# Altium PCB drawingBoard.PcbDoc
Units mm, origin at the board's own origin, x right, y up, seen from the top; angles counter-clockwise.
Board outline 90.17 x 76.83 mm, 2 copper layers (Top Layer, Bottom Layer); 36 components, 54 nets, 226 pads, 16 vias.
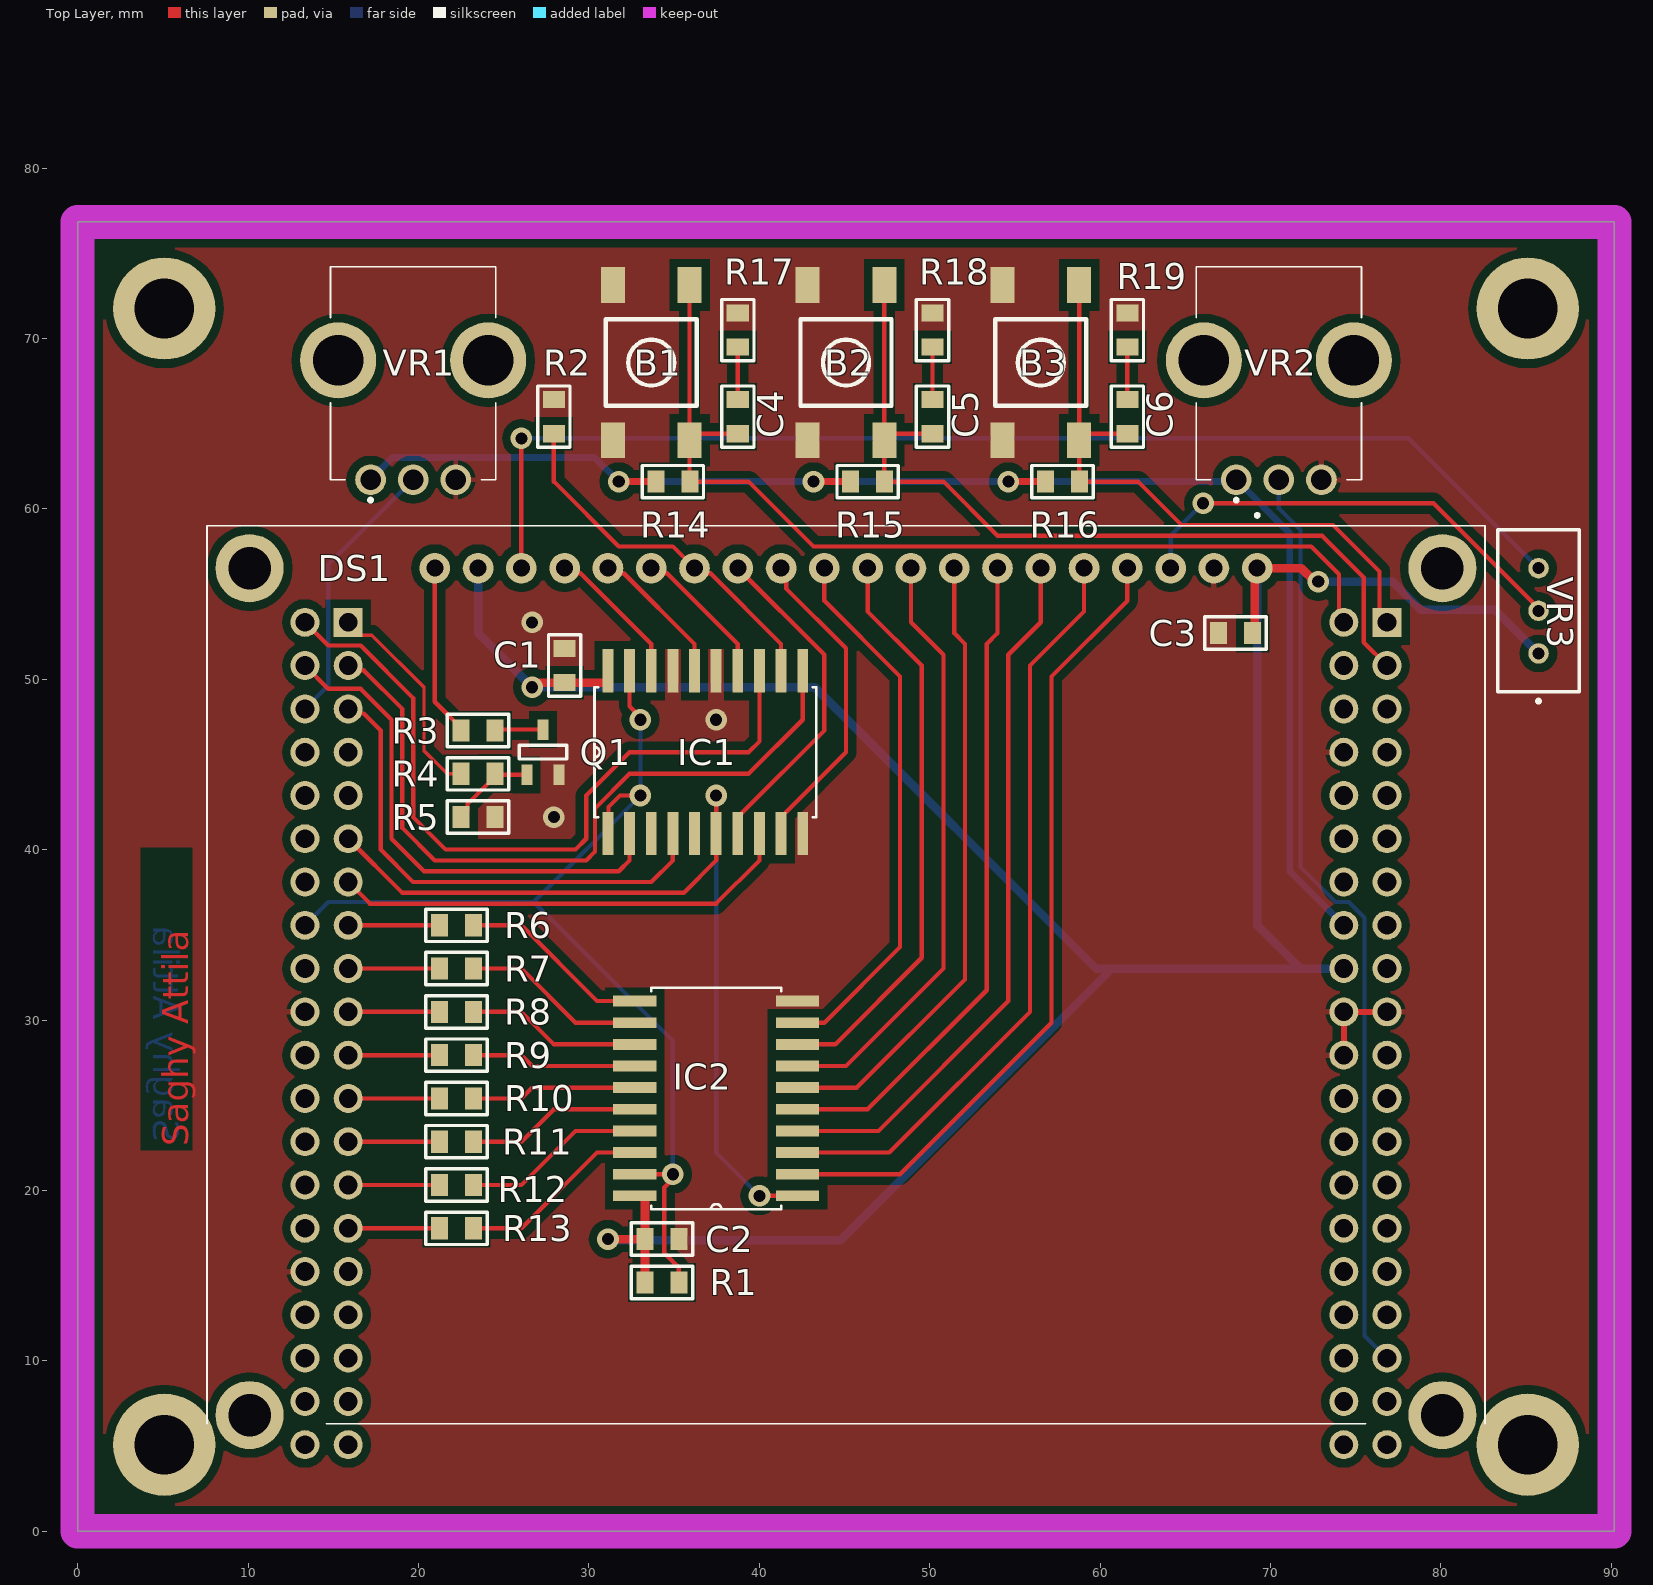
[diagram p0: Top Layer view]
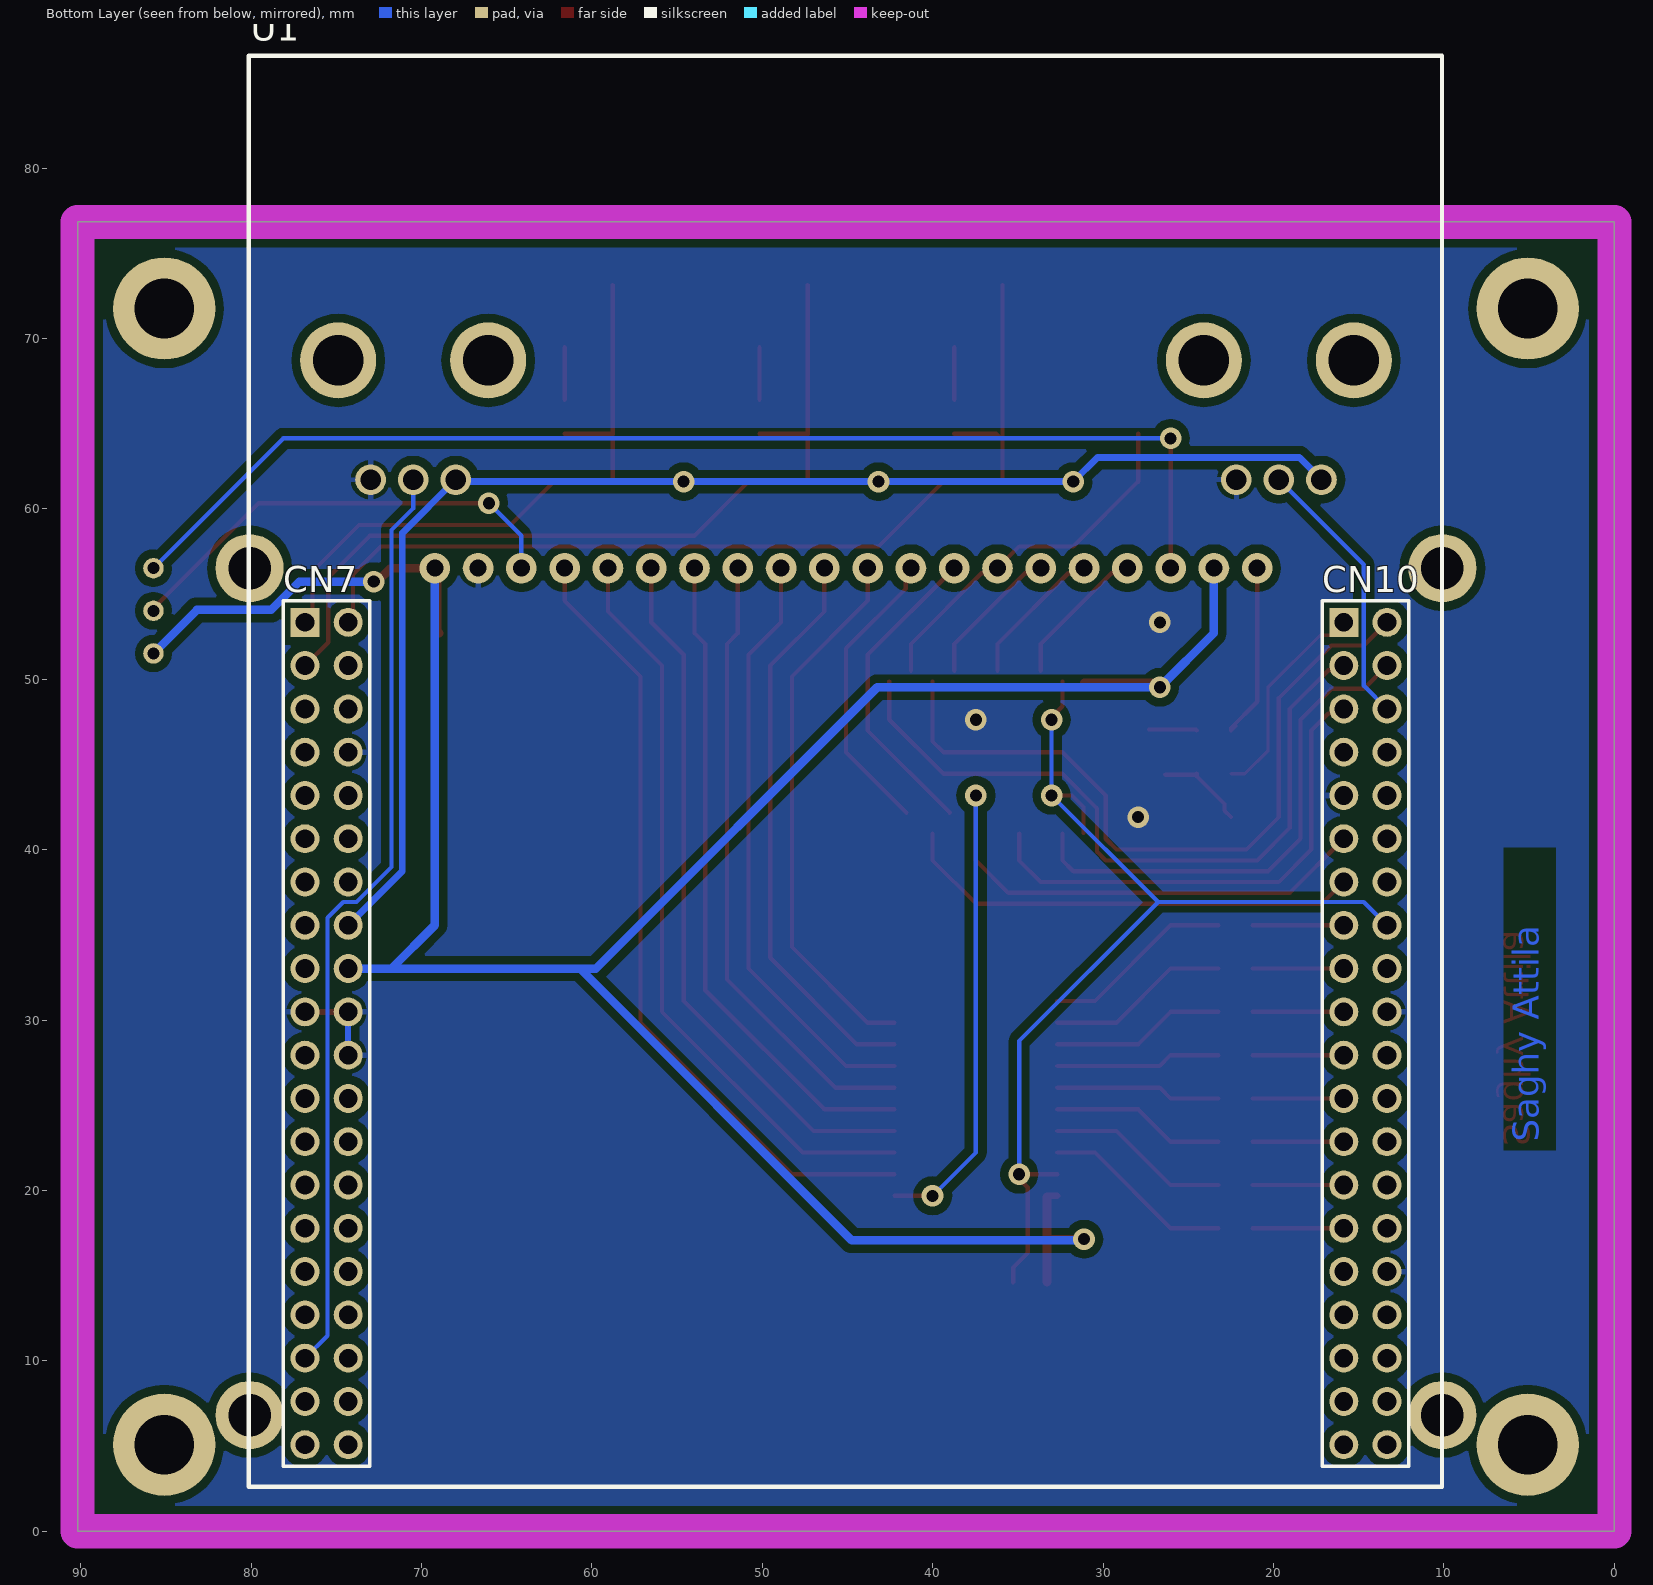
[diagram p1: Bottom Layer view, seen from below]
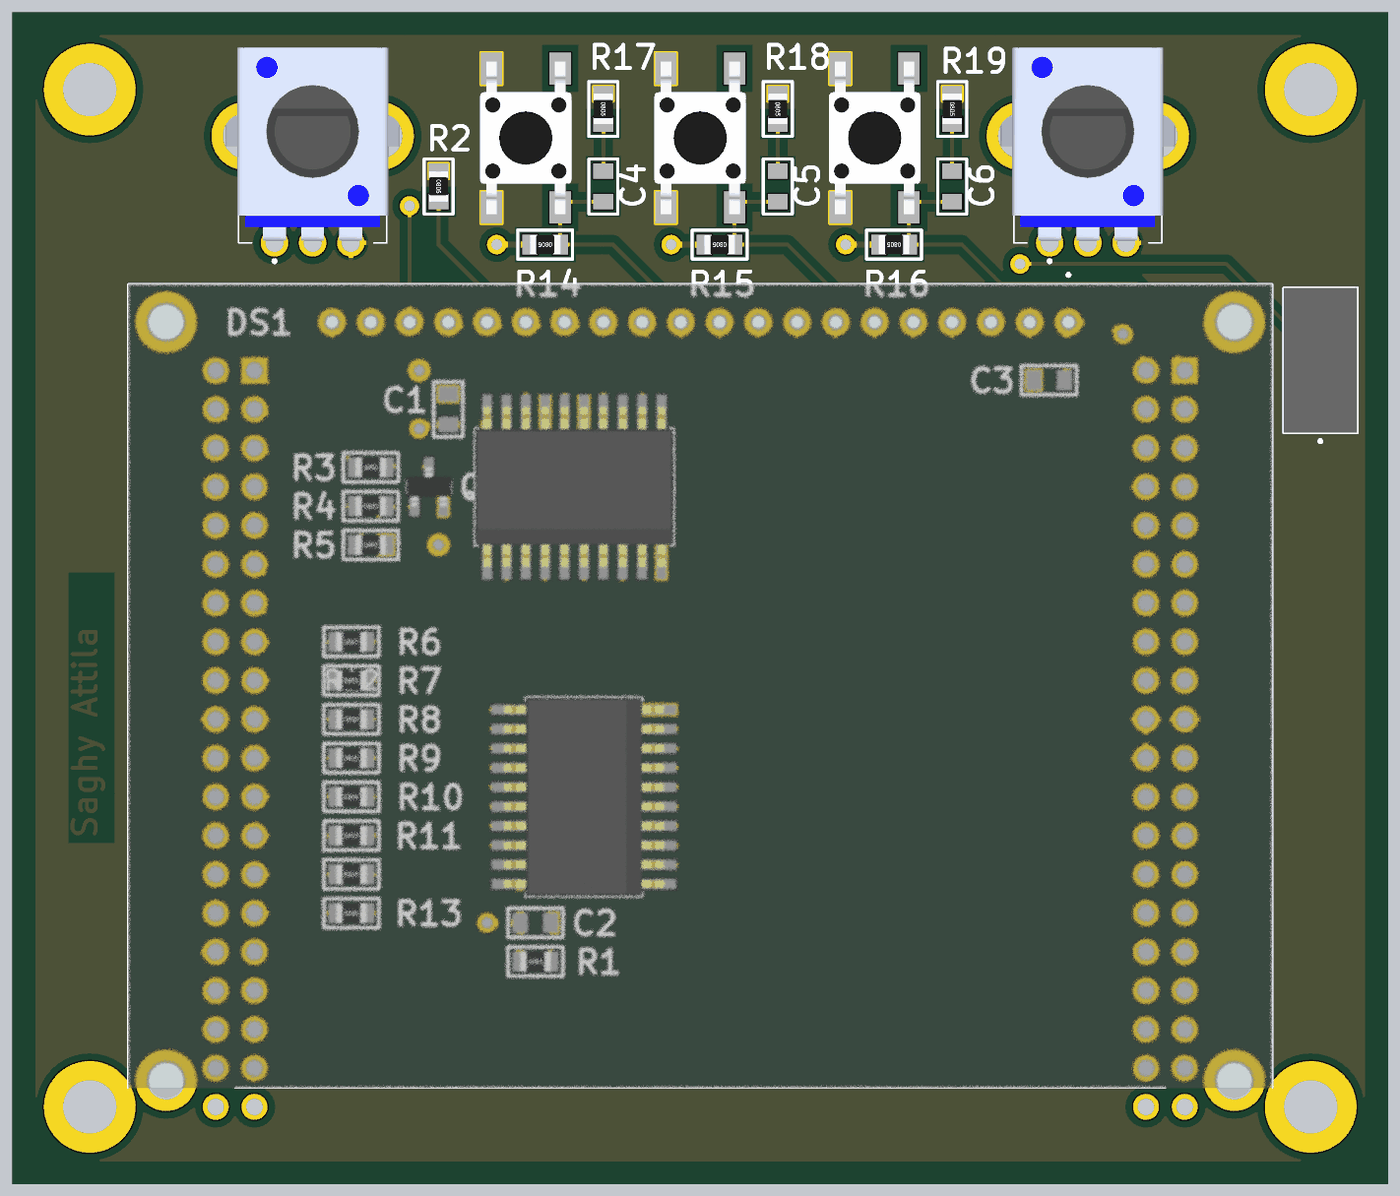
[diagram p2: 3D render of the assembled board from above, using the file's embedded part models]

## Layer stack, top to bottom
Top Solder: solder mask 0.0102, Solder Resist, Dk 3.5
Top Layer: signal copper 0.0356
Dielectric 1: dielectric 0.32, FR-4, Dk 4.8
Bottom Layer: signal copper 0.0356
Bottom Solder: solder mask 0.0102, Solder Resist, Dk 3.5

## Board outline
90.17,76.835 0,76.835 0,0 90.17,0

## Design rules (kind name [scope] priority, off if disabled: settings)
BoardOutlineClearance [All] p1: gap=0.5 ignorepadtopadclearanceinfootprint=FALSE
Clearance [All] p1: gap=0.25 ignorepadtopadclearanceinfootprint=FALSE except(0: Arc-Hole Track-Hole SMDPad-Hole THPad-Hole Via-Hole Fill-Hole Poly-Hole Region-Hole Text-Hole; 0.2: Track-THPad Track-Via THPad-THPad THPad-Via Via-Via; 0.5: Arc-Poly Track-Poly SMDPad-Poly THPad-Poly Via-Poly Fill-Poly Poly-Poly)
ComponentClearance [All] p1: gap=0.254 collisioncheckmode=3 verticalgap=0.2 showdistances=FALSE donotcheckwithout3dbody=TRUE
DiffPairsRouting [All] p1: maxlimit=0.25 minlimit=0.25 mostfreqgap=0.25 toplayer_minwidth=0.3 toplayer_maxwidth=0.38 toplayer_prefwidth=0.38 bottomlayer_minwidth=0.3 bottomlayer_maxwidth=0.38 bottomlayer_prefwidth=0.38 maxuncoupledlength=12.7
HoleSize [All] p1: absolutevalues=TRUE maxlimit=5 minlimit=0.4 maxpercent=80.000 minpercent=20.000
HoleToHoleClearance [All] p1: gap=0.25 allowstackedmicrovias=TRUE
MinimumAnnularRing [All] p1: minimumring=0.2
MinimumSolderMaskSliver [All] p1: minsoldermaskwidth=0.05
PlaneClearance [All] p1: clearance=0.5
PlaneConnect [All] p1: pad.planeconnectstyle=Relief pad.reliefexpansion=0.5 pad.reliefentries=4 pad.reliefconductorwidth=0.3 pad.reliefairgap=0.25 via.planeconnectstyle=Direct via.reliefexpansion=0.508 via.reliefentries=4 via.reliefconductorwidth=0.254 via.reliefairgap=0.254
PolygonConnect [All] p1: thpad.connectstyle=Relief thpad.reliefconductorwidth=0.3 thpad.reliefentries=4 thpad.polygonreliefangle="90 Angle" thpad.airgapwidth=0.25 smdpad.connectstyle=Direct smdpad.reliefconductorwidth=0.3 smdpad.reliefentries=4 smdpad.polygonreliefangle="90 Angle" smdpad.airgapwidth=0.25 via.connectstyle=Direct via.reliefconductorwidth=0.3 via.reliefentries=4 via.polygonreliefangle="90 Angle" via.airgapwidth=0.25
RoutingVias [All] p1: holewidth=0.4 width=0.8 viastyle="Through Hole" minholewidth=0.3 minwidth=0.7 maxholewidth=0.7 maxwidth=1.2
SilkToSilkClearance [All] p1: silktosilkclearance=0.1
SilkToSolderMaskClearance [IsPad] p1: minsilkscreentomaskgap=0.1 clearancetoexposedcopper=TRUE
SolderMaskExpansion [All] p1: expansion=0.1 istentingtop=FALSE
Width [All] p1: maxlimit=2.5 minlimit=0.2 preferedwidth=0.25
21 further rules are at their usual default settings.

## Classes and differential pairs
component class LCD: C1 C2 C3 DS1 IC1 IC2 Q1 R1 R2 R3 R4 R5 R6 R7 R8 R9 R10 R11 R12 R13 VR3
component class Inputs: B1 B2 B3 C4 C5 C6 R14 R15 R16 R17 R18 R19 VR1 VR2
component class Nucleo: U1

## Components (designator, comment, footprint, x,y, rotation, side; value= is the part's Value field where it differs from the comment)
B1 "Button" FP_BTN_SMD 33.655,68.58 r180 top
B2 "Button" FP_BTN_SMD 45.085,68.58 r180 top
B3 "Button" FP_BTN_SMD 56.515,68.58 r180 top
C1 "100n" FP_0805_CAP_085 28.575,50.8 r270 top
C2 "100n" FP_0805_CAP_085 34.29,17.145 r0 top
C3 "100n" FP_0805_CAP_085 67.945,52.705 r0 top
C4 "100n" FP_0805_CAP_085 38.735,65.405 r90 top
C5 "100n" FP_0805_CAP_085 50.165,65.405 r90 top
C6 "100n" FP_0805_CAP_085 61.595,65.405 r90 top
DS1 "RG12864B-BIW-V" RG12864BBIWV 69.215,56.515 r180 top locked
IC1 "74HCT244D" SOIC127P1032X265-20N 36.83,45.72 r90 top locked
IC2 "74HCT245D" SOIC127P1032X265-20N 37.465,25.4 r180 top locked
Q1 "2N7002" FP_SOT23-3 27.305,45.72 r270 top
R1 "10k" FP_0805_RES 34.29,14.605 r180 top
R2 "10k" FP_0805_RES 27.94,65.405 r270 top
R3 "100" FP_0805_RES 23.495,46.99 r180 top
R4 "1k" FP_0805_RES 23.495,44.45 r0 top
R5 "10k" FP_0805_RES 23.495,41.91 r180 top
R6 "1k" FP_0805_RES 22.225,17.78 r0 top
R7 "1k" FP_0805_RES 22.225,20.32 r0 top
R8 "1k" FP_0805_RES 22.225,22.86 r0 top
R9 "1k" FP_0805_RES 22.225,25.4 r0 top
R10 "1k" FP_0805_RES 22.225,27.94 r0 top
R11 "1k" FP_0805_RES 22.225,30.48 r0 top
R12 "1k" FP_0805_RES 22.225,33.02 r0 top
R13 "1k" FP_0805_RES 22.225,35.56 r0 top
R14 "10k" FP_0805_RES 34.925,61.595 r180 top
R15 "10k" FP_0805_RES 46.355,61.595 r180 top
R16 "10k" FP_0805_RES 57.785,61.595 r180 top
R17 "100" FP_0805_RES 38.735,70.485 r270 top
R18 "100" FP_0805_RES 50.165,70.485 r270 top
R19 "100" FP_0805_RES 61.595,70.485 r270 top
U1 "NUCLEO-F446RE" FP_NUCLEO-64_2x20 76.835,53.34 r180 bottom locked
VR1 "PTV09A-4020F-B104" PTV09A4020FB103 19.685,67.31 r0 top
VR2 "PTV09A-4020F-B104" PTV09A4020FB103 70.485,67.31 r0 top
VR3 "RKT3296-103-W" RKT3296103W 85.725,51.515 r90 top

## Footprints (in the part's own frame and the unit in brackets; to place one, negate y for a bottom-side part, rotate by r counter-clockwise, add the part's x,y. Pads: shape width x height; smd on the part's side, far side on the other; paste and mask are expansions set on the pad)
FP_0805_CAP_085 [mm] "0805 kapacitás YAGEO 0.85mm magas"
  rect 1x1.3 smd: 1(-1,0) 2(1,0)
  silkscreen extent -1.8,-0.95 1.8,0.95, body extent -1,-0.64 1.03,0.64, height 0.85
FP_0805_RES [mm] "0805 ellenállás"
  rect 1x1.3 smd: 1(-1,0) 2(1,0)
  silkscreen extent -1.8,-0.95 1.8,0.95, body extent -1,-0.62 1,0.63, height 0.62
FP_BTN_SMD [mm] "SMD Push Button 6x6mm"
  rect 1.4x2.1 smd: 1(2.25,4.55) 2(2.25,-4.55) 3(-2.25,4.55) 4(-2.25,-4.55)
  silkscreen extent -2.67,-2.54 2.67,2.54, body extent -3,-5 3,5, height 5.1
FP_NUCLEO-64_2x20 [mm]
  round 1.7 hole 1.1: 0(0,-48.26) 0(2.54,-48.26) 0(60.96,-48.26) 0(63.5,-48.26) 2(2.54,0) 3(0,-2.54) 4(2.54,-2.54) 5(0,-5.08) 6(2.54,-5.08) 7(0,-7.62) 8(2.54,-7.62) 9(0,-10.16) 10(2.54,-10.16) 11(0,-12.7) 12(2.54,-12.7) 13(0,-15.24) 14(2.54,-15.24) 15(0,-17.78) 16(2.54,-17.78) 17(0,-20.32) 18(2.54,-20.32) 19(0,-22.86) 20(2.54,-22.86) 21(0,-25.4) 22(2.54,-25.4) 23(0,-27.94) 24(2.54,-27.94) 25(0,-30.48) 26(2.54,-30.48) 27(0,-33.02) 28(2.54,-33.02) 29(0,-35.56) 30(2.54,-35.56) 31(0,-38.1) 32(2.54,-38.1) 33(0,-40.64) 34(2.54,-40.64) 35(0,-43.18) 36(2.54,-43.18) 37(0,-45.72) 38(2.54,-45.72) 40(63.5,0) 41(60.96,-2.54) 42(63.5,-2.54) 43(60.96,-5.08) 44(63.5,-5.08) 45(60.96,-7.62) 46(63.5,-7.62) 47(60.96,-10.16) 48(63.5,-10.16) 49(60.96,-12.7) 50(63.5,-12.7) 51(60.96,-15.24) 52(63.5,-15.24) 53(60.96,-17.78) 54(63.5,-17.78) 55(60.96,-20.32) 56(63.5,-20.32) 57(60.96,-22.86) 58(63.5,-22.86) 59(60.96,-25.4) 60(63.5,-25.4) 61(60.96,-27.94) 62(63.5,-27.94) 63(60.96,-30.48) 64(63.5,-30.48) 65(60.96,-33.02) 66(63.5,-33.02) 67(60.96,-35.56) 68(63.5,-35.56) 69(60.96,-38.1) 70(63.5,-38.1) 71(60.96,-40.64) 72(63.5,-40.64) 73(60.96,-43.18) 74(63.5,-43.18) 75(60.96,-45.72) 76(63.5,-45.72)
  rect 1.7x1.7 hole 1.1: 1(0,0) 39(60.96,0)
  silkscreen extent -3.3,-50.72 66.72,33.25, body extent -3.3,-50.72 66.72,33.25, height 11
FP_SOT23-3 [mm] "SOT23-3 tok"
  rect 1.2x0.65 smd: 1(1.327,-0.95) 2(1.327,0.95) 3(-1.327,0)
  silkscreen extent -0.4,-1.4 0.4,1.4, body extent -1.27,-1.46 1.27,1.46, height 0.97
PTV09A4020FB103 [mm]
  round 1.8 hole 1.2: 1(-2.5,-5.6) 2(0,-5.6) 3(2.5,-5.6)
  round 4.46 hole 2.973: 4(-4.4,1.4) 5(4.4,1.4)
  silkscreen extent -4.85,-6.9 4.85,6.9, body extent -5.7,-5.45 5.7,7.2, height 20.06
RG12864BBIWV [mm]
  round 1.8 hole 1: 1(0,0) 2(2.54,0) 3(5.08,0) 4(7.62,0) 5(10.16,0) 6(12.7,0) 7(15.24,0) 8(17.78,0) 9(20.32,0) 10(22.86,0) 11(25.4,0) 12(27.94,0) 13(30.48,0) 14(33.02,0) 15(35.56,0) 16(38.1,0) 17(40.64,0) 18(43.18,0) 19(45.72,0) 20(48.26,0)
  round 4 hole 2.5: MH1(-10.87,0) MH2(59.13,0) MH3(-10.87,49.7) MH4(59.13,49.7)
  silkscreen extent -13.37,-3.2 61.63,50.2, body extent -13.37,-2.5 61.63,50.84, height 11
RKT3296103W [mm]
  round 1.2 hole 0.7: 1(0,0) 2(2.5,0) 3(5,0)
  silkscreen extent -2.9,-2.4 7.25,2.4, body extent -2.25,-2.4 7.25,2.4, height 10.1
SOIC127P1032X265-20N [mil]
  rect 100x25 smd: 1(-188,225) 2(-188,175) 3(-188,125) 4(-188,75) 5(-188,25) 6(-188,-25) 7(-188,-75) 8(-188,-125) 9(-188,-175) 10(-188,-225) 11(188,-225) 12(188,-175) 13(188,-125) 14(188,-75) 15(188,-25) 16(188,25) 17(188,75) 18(188,125) 19(188,175) 20(188,225)
  silkscreen extent -150,-256 150,256, body extent -206,-256 206,256, height 108

## Part data
B1 B2 B3: library part "Button 4P", "Push button", Name="Tactile Switch", Reference=45-05-43, Supplier=Lomex
C1 C2 C3 C4 C5 C6: library part CAP, "Capacitor", Name=Capacitor, Reference=82-13-46, Supplier=Lomex
DS1: "Display", Manufacturer_Name=RAYSTAR, Datasheet Link=https://www.tme.eu/Document/ad0edd8197c217e1346010bf2253878c/RG12864B-GHW-V.pdf, Height=5.9mm, Name=RG12864B-BIW-V, Reference=37-00-81, Supplier=Lomex
IC1: "Buffer/Line driver", Manufacturer_Name=Nexperia, Mouser Part Number=771-74HCT244D, Mouser Price/Stock=https://www.mouser.com/Search/Refine.aspx?Keyword=771-74HCT244D, Name=74HCT244D, Reference=87-05-95, Supplier=Lomex
IC2: "Bidirectional bus transceiver", Manufacturer_Name=Nexperia, Mouser Part Number=N/A, Mouser Price/Stock=https://www.mouser.co.uk/ProductDetail/Nexperia/74HCT245D?qs=vHuUswq2%252Bswq%2FDWSRnGMaw%3D%3D, Name=74HCT245D, Reference=87-06-35, Supplier=Lomex
Q1: library part NMOS, "NMOS", Name=2N7002, Reference=86-00-97, Supplier=Lomex
R1 R2 R3 R4 R5 R6 R7 R8 R9 R10 R11 R12 R13 R14 R15 R16 R17 R18 R19: library part RES, "Resistor", Name=Resistor, Supplier=Lomex
  R1 R2 R5 R14 R15 R16: Reference=80-10-98
  R3 R17 R18 R19: Reference=80-10-74
  R4 R6 R7 R8 R9 R10 R11 R12 R13: Reference=80-10-86
U1: "Development kit", Name="Nucleo F446RE", Reference=NUCLEO, Supplier=Tanszék
VR1 VR2: "Variable Resistor", Manufacturer_Name=Bourns, Arrow Part Number=PTV09A-4020F-B104, Arrow Price/Stock=https://www.arrow.com/en/products/ptv09a-4020f-b104/bourns?region=nac, Datasheet Link=http://www.farnell.com/datasheets/2259384.pdf, Farnell Price/Stock=https://hu.farnell.com/bourns/ptv09a-4020f-b104/pot-rotary-100kohm-9mm-20/dp/2469525, Name=PTV09A-4020F-B104, Reference=2469525, Supplier=Farnell
VR3: "Variable Resistor", Manufacturer_Name="Kings Electronics", Datasheet Link=https://www.kingtronics.com/pdf/RKT-3296.pdf, Height=10mm, Name=RKT3296-103-W, Reference=05-05-89, Supplier=Lomex

## Free pads (board coordinates)
  round 6 hole 3.5: ""(5.08,5.08) ""(5.08,71.755) ""(85.09,5.08) ""(85.09,71.755)

## Via types
v1: diameter 1.27, hole 0.711, Top Layer to Bottom Layer, 16 vias

## Nets (pads, with @x,y where several pads share a name; then routed paths per layer and width w, separated by ;. In a path a pad name is that pad's centre, name@x,y a point inside that pad or via, vN(x,y) a via of type N, cw(c..) or ccw(c..) an arc to the next point about the centre after c; other vN are vias at no path point)
#LCD_EN: IC1.1 IC1.19 IC2.19 R1.1 U1.54 | length 62
  Top Layer w0.25: IC1.1@31.151,40.981 31.151,42.509 31.822,43.18 v1(33.02,43.18) ; IC1.19@32.385,49.86 32.385,48.418 33.02,47.783 v1(33.02,47.625) ; IC2.19 v1(34.925,20.955) 34.925,20.679 34.415,20.169 34.415,16.34 35.271,15.484 35.271,14.624 R1.1
  Bottom Layer w0.25: U1.54 14.7,36.925 26.765,36.925 ; v1(33.02,47.625) v1(33.02,43.18) 26.765,36.925 ; v1(34.925,20.955) 34.925,28.765 26.765,36.925
+3V3: R14.2 R15.2 R16.2 U1.16 VR1.1 VR2.1 | length 87.3
  Top Layer w0.4: v1(31.75,61.595) R14.2 ; v1(43.18,61.595) R15.2 ; v1(54.61,61.595) R16.2
  Bottom Layer w0.4: VR1.1 18.485,63.01 30.335,63.01 v1(31.75,61.595) v1(43.18,61.595) v1(54.61,61.595) 67.87,61.595 VR2.1 71.12,58.575 71.12,38.735 U1.16
+5V: C1.2 C2.1 C3.2 DS1.1 DS1.19 IC1.20 IC2.20 R1.2 U1.18 VR3.1 | length 158.2
  Top Layer w0.4: IC2.20 33.223,19.685 IC2.20@33.29,19.618
  Top Layer w0.5: v1(26.67,49.53) 26.878,49.53 27.148,49.8 C1.2 IC1.20@31.098,49.8 ; v1(31.115,17.145) C2.1 ; R1.2 C2.1 ; IC2.20@33.29,19.618 C2.1 ; C3.2 69.08,52.84 DS1.1@69.08,56.38 ; DS1.1 71.801,56.515 72.588,55.728 v1(72.796,55.728)
  Bottom Layer w0.5: DS1.19 23.495,52.705 v1(26.67,49.53) 43.254,49.53 59.764,33.02 60.699,33.02 ; v1(31.115,17.145) 31.191,17.069 44.747,17.069 60.699,33.02 ; DS1.1 69.215,35.56 71.755,33.02 ; v1(72.796,55.728) 77.164,55.728 78.826,54.065 83.175,54.065 VR3.1 ; U1.18 71.755,33.02 ; 60.699,33.02 71.755,33.02
BL_PWM: R4.1 U1.39 | length 12.5
  Top Layer w0.2: U1.39 16.625,52.59 17.26,52.59 20.32,49.53 20.32,45.804 21.674,44.45 R4.1
BTN1: B1.3 B1.4 C4.1 R14.1 U1.2 | length 57.8
  Top Layer w0.25: R14.1@35.905,61.615 B1.3 ; B1.4 B1.3 ; R14.1 39.37,61.595 43.18,57.785 72.39,57.785 74.018,56.157 74.018,53.617 U1.2 ; C4.1 36.28,64.405 B1.3
BTN2: B2.3 B2.4 C5.1 R15.1 U1.3 | length 50.2
  Top Layer w0.25: R15.1@47.335,61.615 B2.3 ; B2.4 47.335,64.38 47.36,64.405 C5.1 ; R15.1 50.8,61.595 53.975,58.42 73.025,58.42 75.47,55.975 75.47,52.165 U1.3
BTN3: B3.3 B3.4 C6.1 R16.1 U1.1 | length 37
  Top Layer w0.25: R16.1@58.765,61.615 B3.3 ; B3.4 58.765,64.38 58.79,64.405 C6.1 ; R16.1 62.23,61.595 64.77,59.055 73.66,59.055 76.391,56.324 76.391,53.784 U1.1
CS1: DS1.12 IC1.9 | length 17.4
  Top Layer w0.25: DS1.12 41.572,56.218 41.572,55.329 45.085,51.816 45.085,45.72 IC1.9@41.531,42.166
CS2: DS1.13 IC1.7 | length 18.5
  Top Layer w0.25: DS1.13 43.815,51.435 43.815,46.99 IC1.7@38.991,42.166
D/I: DS1.16 IC1.16 | length 8.5
  Top Layer w0.25: DS1.16 31.412,56.218 32.047,56.218 36.195,52.07 IC1.16
DB0: DS1.4 IC2.2 | length 47.1
  Top Layer w0.25: IC2.2 48.26,20.955 57.15,29.845 57.15,50.165 61.595,54.61 DS1.4
DB1: DS1.5 IC2.3 | length 44.4
  Top Layer w0.25: IC2.3 47.625,22.225 55.88,30.48 55.88,50.8 59.055,53.975 DS1.5
DB2: DS1.6 IC2.4 | length 41.7
  Top Layer w0.25: IC2.4 46.99,23.495 54.61,31.115 54.61,51.435 56.515,53.34 DS1.6
DB3: DS1.7 IC2.5 | length 39
  Top Layer w0.25: IC2.5 46.355,24.765 53.34,31.75 53.34,52.07 53.975,52.705 DS1.7
DB4: DS1.8 IC2.6 | length 36.9
  Top Layer w0.25: IC2.6 45.72,26.035 52.07,32.385 52.07,52.07 51.435,52.705 DS1.8
DB5: DS1.9 IC2.7 | length 35.2
  Top Layer w0.25: IC2.7 45.085,27.305 50.8,33.02 50.8,51.435 48.895,53.34 DS1.9
DB6: DS1.10 IC2.8 | length 33.6
  Top Layer w0.25: IC2.8 44.45,28.575 49.53,33.655 49.53,50.8 46.355,53.975 DS1.10
DB7: DS1.11 IC2.9 | length 31.9
  Top Layer w0.25: IC2.9 43.815,29.845 48.26,34.29 48.26,50.165 43.815,54.61 DS1.11
E: DS1.17 IC1.18 | length 8.5
  Top Layer w0.25: DS1.17 28.872,56.218 29.507,56.218 33.655,52.07 IC1.18
GND: B1.1 B1.2 B2.1 B2.2 B3.1 B3.2 C1.1 C2.2 C3.1 DS1.2 IC1.10 IC1.15 IC1.17 IC2.10 Q1.2 R2.1 R5.1 R17.1 R18.1 R19.1 U1.8 U1.19 U1.20 U1.22 U1.47 U1.58 U1.70 VR1.3 VR2.3 | length 7.6
  Top Layer w0.35: U1.22 U1.20 U1.19
  Bottom Layer w0.35: U1.22 U1.20
  other v1: 27.94,41.91 37.465,47.625 26.67,53.34
K: DS1.20 R3.2 | length 10.5
  Top Layer w0.25: DS1.20 20.955,48.68 22.495,47.14 R3.2 R3.2@22.225,47.26
LCD_CS1: IC1.11 U1.41 | length 42.6
  Top Layer w0.25: U1.41 16.152,50.523 16.787,50.523 19.05,48.26 19.05,41.275 20.955,39.37 29.845,39.37 30.359,39.884 30.359,42.424 32.385,44.45 39.37,44.45 42.545,47.625 IC1.11@42.545,49.86
LCD_CS2: IC1.13 U1.40 | length 43.9
  Top Layer w0.25: U1.40 14.7,51.975 16.605,51.975 19.685,48.895 19.685,41.91 21.59,40.005 29.21,40.005 29.845,40.64 29.845,43.18 32.385,45.72 39.37,45.72 40.005,46.355 IC1.13@40.005,49.86
LCD_D/I: IC1.4 U1.43 | length 29.5
  Top Layer w0.25: U1.43 16.152,47.983 16.787,47.983 17.78,46.99 17.78,40.005 19.685,38.1 33.655,38.1 34.925,39.37 IC1.4
LCD_DB0: R6.1 U1.67 | length 5.3
  Top Layer w0.25: U1.67 R6.1
LCD_DB1: R7.1 U1.65 | length 5.3
  Top Layer w0.25: U1.65 R7.1
LCD_DB2: R8.1 U1.63 | length 5.3
  Top Layer w0.25: U1.63 R8.1
LCD_DB3: R9.1 U1.61 | length 5.3
  Top Layer w0.25: U1.61 R9.1
LCD_DB4: R10.1 U1.59 | length 5.3
  Top Layer w0.25: U1.59 R10.1
LCD_DB5: R11.1 U1.57 | length 5.3
  Top Layer w0.25: U1.57 R11.1
LCD_DB6: R12.1 U1.55 | length 5.3
  Top Layer w0.25: U1.55 R12.1
LCD_DB7: R13.1 U1.53 | length 5.3
  Top Layer w0.25: U1.53 R13.1
LCD_E: IC1.2 U1.42 | length 30
  Top Layer w0.25: U1.42 14.7,49.435 16.605,49.435 18.415,47.625 18.415,40.64 20.32,38.735 31.75,38.735 32.385,39.37 IC1.2
LCD_R/W: IC1.6 IC2.1 U1.49 | length 54.3
  Top Layer w0.25: U1.49 19.05,37.465 35.56,37.465 37.465,39.37 v1(37.465,43.18) ; v1(40.005,19.685) IC2.1
  Bottom Layer w0.25: v1(37.465,43.18) 37.465,22.225 v1(40.005,19.685)
LCD_RST: IC1.8 U1.51 | length 27.3
  Top Layer w0.25: U1.51 17.145,36.83 37.465,36.83 40.005,39.37 IC1.8
NetC4_2: C4.2 R17.2 | length 3.1
  Top Layer w0.25: C4.2 R17.2
NetC5_2: C5.2 R18.2 | length 3.1
  Top Layer w0.25: C5.2 R18.2
NetC6_2: C6.2 R19.2 | length 3.1
  Top Layer w0.25: C6.2 R19.2
NetIC2_11: IC2.11 R13.2 | length 11.3
  Top Layer w0.25: R13.2 26.035,35.56 30.48,31.115 IC2.11
NetIC2_12: IC2.12 R12.2 | length 10.8
  Top Layer w0.25: R12.2 26.035,33.02 29.21,29.845 IC2.12
NetIC2_13: IC2.13 R11.2 | length 10.3
  Top Layer w0.25: R11.2 26.035,30.48 27.94,28.575 IC2.13
NetIC2_14: IC2.14 R10.2 | length 9.7
  Top Layer w0.25: R10.2 26.035,27.94 26.67,27.305 IC2.14
NetIC2_15: IC2.15 R9.2 | length 9.7
  Top Layer w0.25: R9.2 26.035,25.4 26.67,26.035 IC2.15
NetIC2_16: IC2.16 R8.2 | length 10.3
  Top Layer w0.25: R8.2 26.035,22.86 27.94,24.765 IC2.16
NetIC2_17: IC2.17 R7.2 | length 10.8
  Top Layer w0.25: R7.2 26.035,20.32 29.21,23.495 IC2.17
NetIC2_18: IC2.18 R6.2 | length 11.3
  Top Layer w0.25: R6.2 26.035,17.78 30.48,22.225 IC2.18
NetQ1_1: Q1.1 R4.2 R5.2 | length 5.2
  Top Layer w0.25: R5.2 22.87,42.285 22.87,42.675 24.495,44.3 R4.2 ; R4.2@24.552,44.393 Q1.1
NetQ1_2: Q1.3 R3.1 | length 2.8
  Top Layer w0.25: R3.1 24.552,47.047 Q1.3
POT1: U1.44 VR1.2 | length 16.1
  Bottom Layer w0.25: U1.44 14.7,49.625 14.7,56.725 VR1.2
POT2: U1.35 VR2.2 | length 54.6
  Bottom Layer w0.25: VR2.2 70.485,60.023 71.755,58.753 71.755,38.978 73.808,36.925 74.592,36.925 75.517,35.999 75.517,11.478 U1.35
R/W: DS1.15 IC1.14 | length 8.5
  Top Layer w0.25: DS1.15 33.952,56.218 34.587,56.218 38.735,52.07 IC1.14
RST: DS1.14 IC1.12 R2.2 | length 21.7
  Top Layer w0.25: R2.2 27.94,61.595 31.75,57.785 34.925,57.785 36.492,56.218 37.127,56.218 41.275,52.07 IC1.12
VEE: DS1.18 VR3.3 | length 70.5
  Top Layer w0.25: DS1.18 v1(26.035,64.135)
  Bottom Layer w0.25: v1(26.035,64.135) 78.105,64.135 VR3.3
VO: DS1.3 VR3.2 | length 27
  Top Layer w0.25: v1(66.04,60.325) 79.563,60.325 85.725,54.163 VR3.2
  Bottom Layer w0.25: DS1.3 64.135,58.42 v1(66.04,60.325)
pads on no net: DS1.MH1 DS1.MH2 DS1.MH3 DS1.MH4 IC1.3 IC1.5 U1.0 U1.4 U1.5 U1.6 U1.7 U1.9 U1.10 U1.11 U1.12 U1.13 U1.14 U1.15 U1.17 U1.21 U1.23 U1.24 U1.25 U1.26 U1.27 U1.28 U1.29 U1.30 U1.31 U1.32 U1.33 U1.34 U1.36 U1.37 U1.38 U1.45 U1.46 U1.48 U1.50 U1.52 U1.56 U1.60 U1.62 U1.64 U1.66 U1.68 U1.69 U1.71 U1.72 U1.73 U1.74 U1.75 U1.76 VR1.4 VR1.5 VR2.4 VR2.5

## Polygon pours and split planes (outlines as drawn)
GND on Bottom Layer "Bottom Layer-GND" (solid, remove dead copper, pour order 11): 90.17,76.835 0,76.835 0,0 90.17,0
GND on Top Layer "Top Layer-GND" (solid, remove dead copper, pour order 22): 0,0 90.17,0 90.17,76.835 0,76.835

## Keep-outs
Keep-Out Layer:
  the board outline again, w2

## Other copper
Top Layer:
  pour cut-out: 34.472,51.765 35.56,51.765 35.56,51.994 35.23,52.324 34.468,52.324
  pour cut-out: 36.899,51.765 38.017,51.765 38.149,52.248 37.012,52.248 36.832,52.068
  pour cut-out: 17.145,44.86 17.016,44.989 16.415,44.388 16.1,44.388 16.1,41.972 16.797,41.275 17.145,41.275
  text "Saghy Attila" at 6.477,22.606 h1.52 r90
Bottom Layer:
  pour cut-out: 70.414,58.283 68.205,60.492 67.108,60.492 64.772,58.156 64.772,57.637 65.471,56.938 65.682,57.15 70.485,57.15 70.414,57.476
  text "Saghy Attila" at 4.445,22.86 h1.52 r270

## Silkscreen, mask and mechanical layers (free items; w line width, h text height)
Mechanical 1:
  the board outline again, w0.254

## Text inside footprints (layer, text, board x,y; h text height)
U1: Bottom Overlay "CN10" at 17.145,55.118 h1.52; Bottom Overlay "CN7" at 78.105,55.118 h1.52